# EAGLE board PID-Demo (EAGLE 9.7.0)
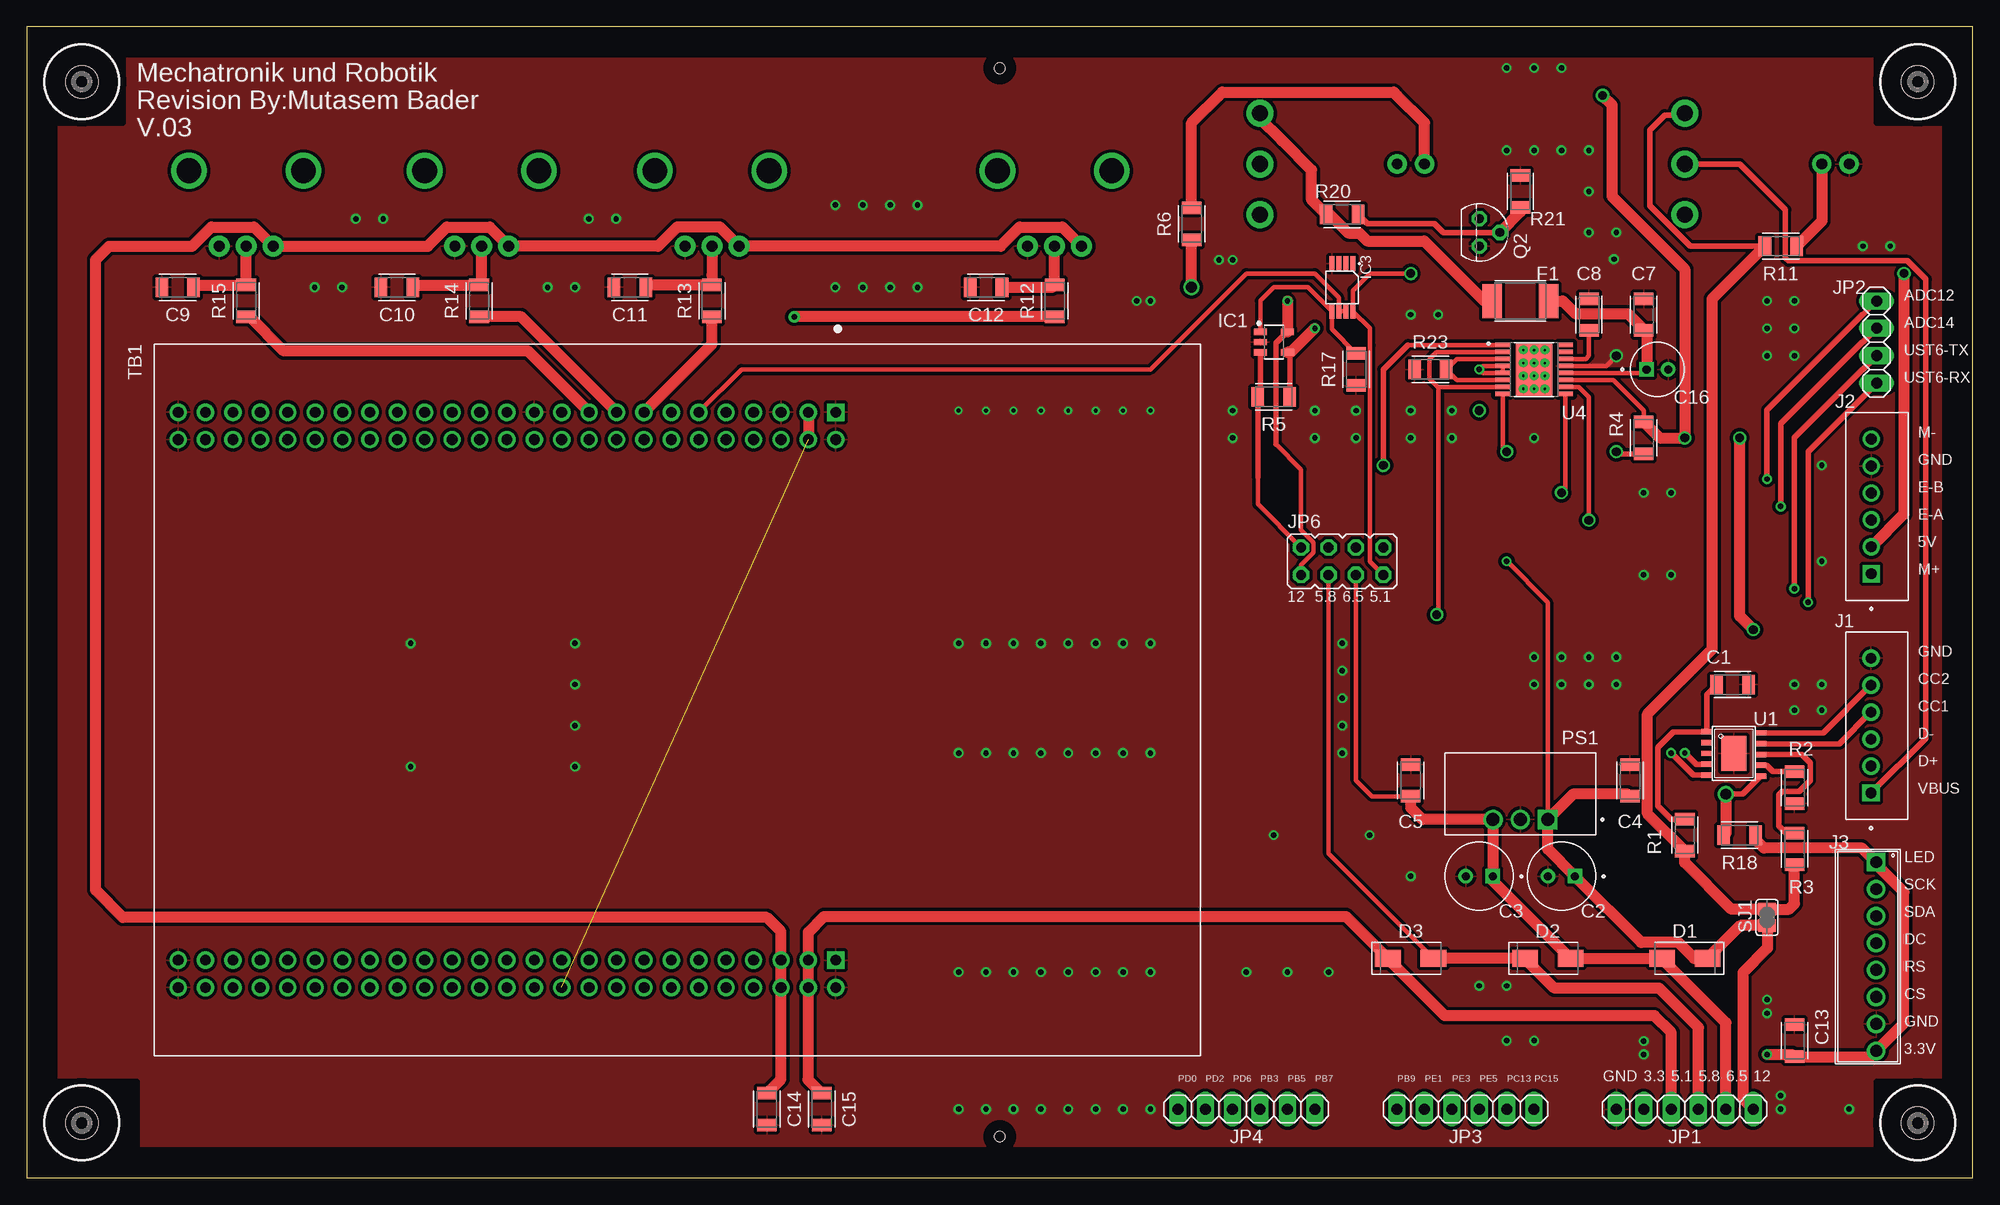
[diagram p0: board, top side]
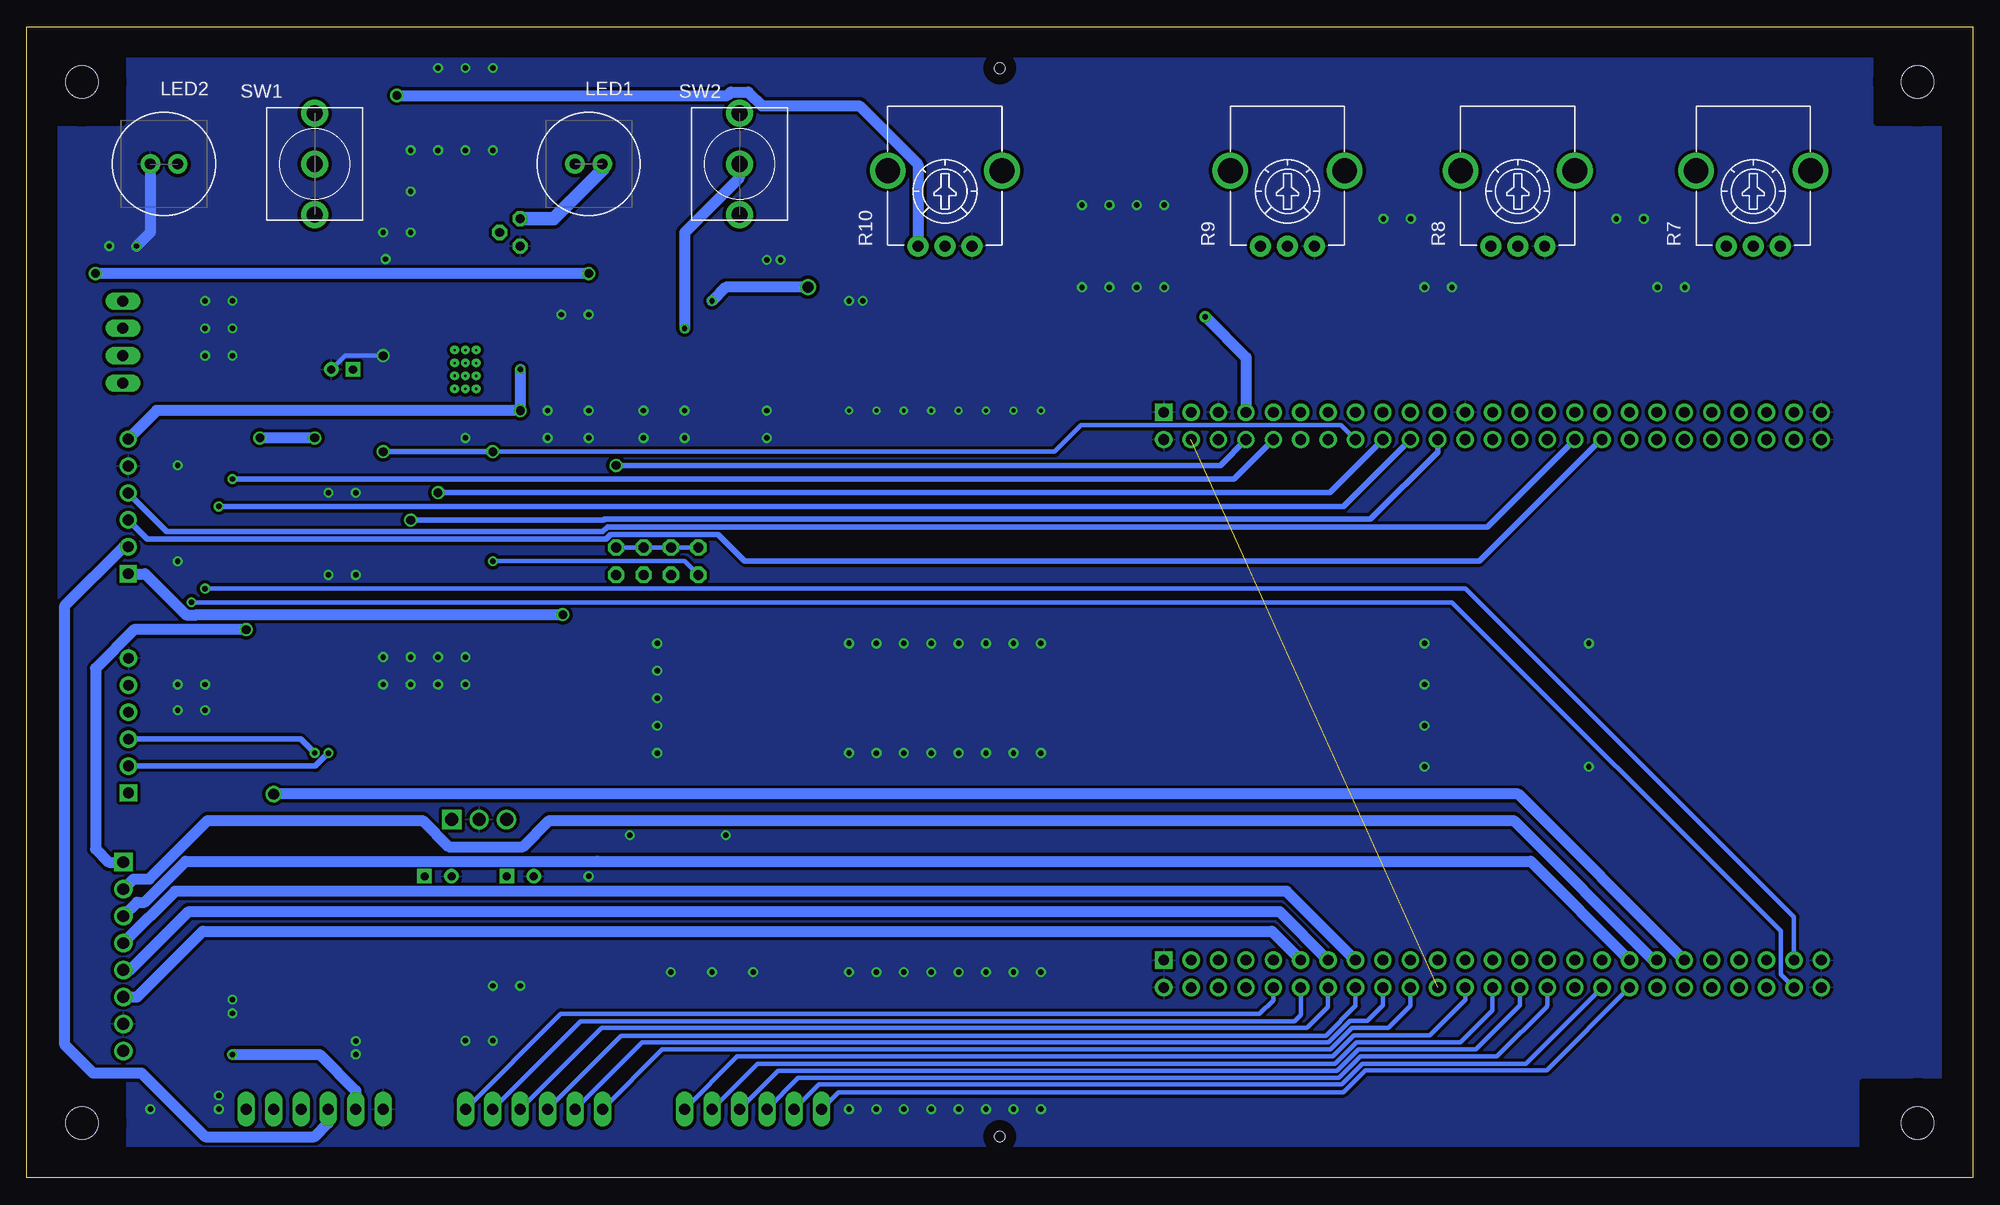
[diagram p1: board, bottom side, seen from below]

Size 180.34 x 106.68 mm. Coordinates in mm from the lower left corner, seen from the top.
Outline: 0,0 180.34,0 180.34,106.68 0,106.68 0,0
Copper layers (1*16): Top / Bottom
Stack-up Default Layer Stack: Top User Defined 0.035mm / Dielectric-1 User Defined 1.5mm / Bottom User Defined 0.035mm
Design rules: minimum copper width 0.4mm, minimum drill size 0.5mm, copper clearance wire_polygon to wire_polygon 0.2mm, copper clearance wire_polygon to pad_smd 0.2mm, copper clearance wire_polygon to via 0.2mm, copper clearance pad_smd to pad_smd 0.2mm, copper clearance pad_smd to via 0.2mm, copper clearance via to via 0.2mm, copper clearance smd to pad (same net) 0.2mm, copper clearance smd to via (same net) 0.2mm, copper clearance smd to smd (same net) 0.2mm, dimension clearance 40mil, via restrict clearance 0.3mm, restrict clearance 0.3mm, drill distance 0.25mm, keepout clearance 0mil
Holes 1 mm at 90.17,102.87 90.17,3.81
RestrictTop: area 0,0 to 10.2,8.9; area 171.4,0 to 180.3,8.9; area 10.2,0 to 171.4,2.5; area 171.4,97.8 to 180.3,106.7; area 8.9,104.1 to 171.4,106.7; area 0,97.8 to 8.9,106.7; area 177.8,8.9 to 180.3,97.8; area 0,8.9 to 2.5,97.8
RestrictBottom: area 0,97.8 to 8.9,106.7; area 8.9,104.1 to 171.4,106.7; area 171.4,97.8 to 180.3,106.7; area 171.4,0 to 180.3,8.9; area 0,0 to 10.2,8.9; area 10.2,0 to 171.4,2.5; area 177.8,8.9 to 180.3,97.8; area 0,8.9 to 2.5,97.8

## Footprints (pad centres in the part's own frame; a part is rotated, then mirrored left to right if it is on the bottom)
CAPC3216X135 = smd 1.165 x 1.815: 1 -1.475,0; 2 1.475,0
CAPPRD250W50D630H1120 = drill 0.75 pad 1.1: N 1.25,0 | drill 0.75 pad 1.1 square: P -1.25,0
CAPPRD200W50D500H1100 = drill 0.75 pad 1.1: N 1,0 | drill 0.75 pad 1.1 square: P -1,0
DIOM5226X290N = smd 2.392 x 1.565: 1 -2.108,0; 2 2.108,0
FUSC4532X125 = smd 1.78 x 3.15: 1 -2.615,0; 2 2.615,0
SOT95P280X145-5N = smd 1.209 x 0.589: 1 -1.253,0.95; 2 -1.253,0; 3 -1.253,-0.95; 4 1.253,-0.95; 5 1.253,0.95
VSSOP-8-DGK = smd 1.4 x 0.45: 1 -2.2,0.975; 2 -2.2,0.325; 3 -2.2,-0.325; 4 -2.2,-0.975; 5 2.2,-0.975; 6 2.2,-0.325; 7 2.2,0.325; 8 2.2,0.975
JST_B6B-XH-A(LF)(SN) = drill 1 square: 1 6.25,-0.525 | drill 1: 2 3.75,-0.525; 3 1.25,-0.525; 4 -1.25,-0.525; 5 -3.75,-0.525; 6 -6.25,-0.525
STECKEVERINDER-8 = drill 1.1 square: P$1 3.77,-1.23 | drill 1.1: P$2 3.77,-3.73; P$3 3.77,-6.23; P$4 3.77,-8.73; P$5 3.77,-11.23; P$6 3.77,-13.73; P$7 3.77,-16.23; P$8 3.77,-18.73
1X06 = drill 1.016 long: 1 -6.35,0; 2 -3.81,0; 3 -1.27,0; 4 1.27,0; 5 3.81,0; 6 6.35,0
1X04 = drill 1.016 long: 1 -3.81,0; 2 -1.27,0; 3 1.27,0; 4 3.81,0
JP4Q = drill 0.914 octagon: 1 -3.81,-1.27; 2 -3.81,1.27; 3 -1.27,-1.27; 4 -1.27,1.27; 5 1.27,-1.27; 6 1.27,1.27; 7 3.81,-1.27; 8 3.81,1.27
CML-19060001-PANEL-M8 = drill 1 pad 1.8: 1 0,1.27; 2 0,-1.27
CONV_TSR_3-2465N = drill 1.2 pad 1.8 square: 1 -2.54,2.36 | drill 1.2 pad 1.8: 2 0,2.36; 3 2.54,2.36
TO92 = drill 0.813 octagon: 1 -1.27,0; 2 0,1.905; 3 1.27,0
RESC3216X70 = smd 1.165 x 1.815: 1 -1.475,0; 2 1.475,0
RK09 = drill 1 pad 1.93: A -2.5,0; E 2.5,0; S 0,0 | drill 2.3 pad 3: P$1 -5.3,7; P$2 5.3,7
RK09K1130A6S = drill 1 pad 1.93: A -2.5,0; E 2.5,0; S 0,0 | drill 2.3 pad 3: P$1 -5.3,7; P$2 5.3,7
SJ = smd 1.168 x 1.6: 1 -0.762,0; 2 0.762,0
GOOBAY-10022-PANEL = drill 1.5 pad 2.5: 1 0,4.7; 2 0,0; 3 0,-4.7
MODULE_STM32F4DISCOVERY = drill 1 square: P1_1 -26.67,14.68; P2_1 24.13,14.68 | drill 1: P1_2 -24.13,14.68; P1_3 -26.67,12.14; P1_4 -24.13,12.14; P1_5 -26.67,9.6; P1_6 -24.13,9.6; P1_7 -26.67,7.06; P1_8 -24.13,7.06; P1_9 -26.67,4.52; P1_10 -24.13,4.52; P1_11 -26.67,1.98; P1_12 -24.13,1.98; P1_13 -26.67,-0.56; P1_14 -24.13,-0.56; P1_15 -26.67,-3.1; P1_16 -24.13,-3.1; P1_17 -26.67,-5.64; P1_18 -24.13,-5.64; P1_19 -26.67,-8.18; P1_20 -24.13,-8.18; P1_21 -26.67,-10.72; P1_22 -24.13,-10.72; P1_23 -26.67,-13.26; P1_24 -24.13,-13.26; P1_25 -26.67,-15.8; P1_26 -24.13,-15.8; P1_27 -26.67,-18.34; P1_28 -24.13,-18.34; P1_29 -26.67,-20.88; P1_30 -24.13,-20.88; P1_31 -26.67,-23.42; P1_32 -24.13,-23.42; P1_33 -26.67,-25.96; P1_34 -24.13,-25.96; P1_35 -26.67,-28.5; P1_36 -24.13,-28.5; P1_37 -26.67,-31.04; P1_38 -24.13,-31.04; P1_39 -26.67,-33.58; P1_40 -24.13,-33.58; P1_41 -26.67,-36.12; P1_42 -24.13,-36.12; P1_43 -26.67,-38.66; P1_44 -24.13,-38.66; P1_45 -26.67,-41.2; P1_46 -24.13,-41.2; P1_47 -26.67,-43.74; P1_48 -24.13,-43.74; P1_49 -26.67,-46.28; P1_50 -24.13,-46.28; P2_2 26.67,14.68; P2_3 24.13,12.14; P2_4 26.67,12.14; P2_5 24.13,9.6; P2_6 26.67,9.6; P2_7 24.13,7.06; P2_8 26.67,7.06; P2_9 24.13,4.52; P2_10 26.67,4.52; P2_11 24.13,1.98; P2_12 26.67,1.98; P2_13 24.13,-0.56; P2_14 26.67,-0.56; P2_15 24.13,-3.1; P2_16 26.67,-3.1; P2_17 24.13,-5.64; P2_18 26.67,-5.64; P2_19 24.13,-8.18; P2_20 26.67,-8.18; P2_21 24.13,-10.72; P2_22 26.67,-10.72; P2_23 24.13,-13.26; P2_24 26.67,-13.26; P2_25 24.13,-15.8; P2_26 26.67,-15.8; P2_27 24.13,-18.34; P2_28 26.67,-18.34; P2_29 24.13,-20.88; P2_30 26.67,-20.88; P2_31 24.13,-23.42; P2_32 26.67,-23.42; P2_33 24.13,-25.96; P2_34 26.67,-25.96; P2_35 24.13,-28.5; P2_36 26.67,-28.5; P2_37 24.13,-31.04; P2_38 26.67,-31.04; P2_39 24.13,-33.58; P2_40 26.67,-33.58; P2_41 24.13,-36.12; P2_42 26.67,-36.12; P2_43 24.13,-38.66; P2_44 26.67,-38.66; P2_45 24.13,-41.2; P2_46 26.67,-41.2; P2_47 24.13,-43.74; P2_48 26.67,-43.74; P2_49 24.13,-46.28; P2_50 26.67,-46.28
CH224K = smd 2.3 x 3.2: P$0 2,2.5 | smd 1.016 x 0.508: P$1 -0.5,4.5; P$2 -0.5,3.5; P$3 -0.5,2.5; P$4 -0.5,1.5; P$5 -0.5,0.5; P$6 4.5,4.4; P$7 4.5,3.4; P$8 4.5,2.4; P$9 4.5,1.4; P$10 4.5,0.4
IC_DRV8848PWPR = smd 1.5 x 0.45: 1 -2.9,2.275; 2 -2.9,1.625; 3 -2.9,0.975; 4 -2.9,0.325; 5 -2.9,-0.325; 6 -2.9,-0.975; 7 -2.9,-1.625; 8 -2.9,-2.275; 9 2.9,-2.275; 10 2.9,-1.625; 11 2.9,-0.975; 12 2.9,-0.325; 13 2.9,0.325; 14 2.9,0.975; 15 2.9,1.625; 16 2.9,2.275 | smd 3.4 x 5: 17 0,0 | drill 0.2 pad 0.3: 18 -1,1.8; 19 0,1.8; 20 1,1.8; 21 -1,0.6; 22 0,0.6; 23 1,0.6; 24 -1,-0.6; 25 0,-0.6; 26 1,-0.6; 27 -1,-1.8; 28 0,-1.8; 29 1,-1.8
DRIL-3 = hole 3: 0,0

## Placement (x,y rotation side)
C1  1µF  [CAPC3216X135]  158.09,45.72 0 top
C2  47µF  [CAPPRD250W50D630H1120]  142.24,27.94 180 top
C3  47µF  [CAPPRD250W50D630H1120]  134.62,27.94 180 top
C4  0,1µF  [CAPC3216X135]  148.59,36.83 90 top
C5  10µF  [CAPC3216X135]  128.27,36.83 90 top
C7  0,1µF  [CAPC3216X135]  149.86,80.01 90 top
C8  2,2µF  [CAPC3216X135]  144.78,80.01 90 top
C9  100nF  [CAPC3216X135]  13.97,82.55 180 top
C10  100nF  [CAPC3216X135]  34.29,82.55 180 top
C11  100nF  [CAPC3216X135]  55.88,82.55 180 top
C12  100nF  [CAPC3216X135]  88.9,82.55 180 top
C13  10µF  [CAPC3216X135]  163.83,12.7 270 top
C14  100nF  [CAPC3216X135]  68.58,6.35 270 top
C15  100nF  [CAPC3216X135]  73.66,6.35 270 top
C16  10µF  [CAPPRD200W50D500H1100]  151.13,74.93 0 top
D1  DIODEDO-214AC(SMA)  [DIOM5226X290N]  153.67,20.32 180 top
D2  DIODEDO-214AC(SMA)  [DIOM5226X290N]  140.97,20.32 0 top
D3  DIODEDO-214AC(SMA)  [DIOM5226X290N]  128.27,20.32 0 top
F1  1812L010  [FUSC4532X125]  138.43,81.28 180 top
IC1  INA138NA_250G4  [SOT95P280X145-5N]  115.57,77.47 0 top
IC3  OPA2340EA  [VSSOP-8-DGK]  121.92,82.55 270 top
J1  B6B-XH-A(LF)(SN)  [JST_B6B-XH-A(LF)(SN)]  171.45,41.91 270 top
J2  B6B-XH-A(LF)(SN)  [JST_B6B-XH-A(LF)(SN)]  171.49,62.23 270 top
J3  STECKVERBINDER-8  [STECKEVERINDER-8]  167.64,30.48 0 top
JP1  PINHD-1X6  [1X06]  153.67,6.35 180 top
JP2  PINHD-1X4  [1X04]  171.45,77.47 270 top
JP3  PINHD-1X6  [1X06]  133.35,6.35 180 top
JP4  PINHD-1X6  [1X06]  113.03,6.35 180 top
JP6  [JP4Q]  121.92,57.15 0 top
LED1  [CML-19060001-PANEL-M8]  128.27,93.98 90 bottom
LED2  [CML-19060001-PANEL-M8]  167.64,93.98 270 bottom
PS1  TSR_3-2465N  [CONV_TSR_3-2465N]  138.43,35.56 180 top
Q2  NMOSFET_TO92-DGS  [TO92]  134.62,87.63 270 top
R1  1KΩ  [RESC3216X70]  153.67,31.75 90 top
R2  24KΩ  [RESC3216X70]  163.83,36.17 90 top
R3  10KΩ  [RESC3216X70]  163.83,30.48 270 top
R4  10KΩ  [RESC3216X70]  149.86,68.58 90 top
R5  250mΩ  [RESC3216X70]  115.57,72.39 180 top
R6  1KΩ  [RESC3216X70]  107.95,88.41 90 top
R7  RK09  [RK09]  20.32,86.36 0 bottom
R8  RK09  [RK09]  42.16,86.36 0 bottom
R9  RK09  [RK09]  63.5,86.36 0 bottom
R10  RK09  [RK09K1130A6S]  95.25,86.36 0 bottom
R11  4,7KΩ  [RESC3216X70]  162.56,86.36 180 top
R12  470Ω  [RESC3216X70]  95.25,81.28 90 top
R13  470Ω  [RESC3216X70]  63.5,81.28 90 top
R14  470Ω  [RESC3216X70]  41.91,81.28 90 top
R15  470Ω  [RESC3216X70]  20.32,81.28 90 top
R17  24KΩ  [RESC3216X70]  123.19,74.93 90 top
R18  10KΩ  [RESC3216X70]  158.75,31.75 0 top
R20  220Ω  [RESC3216X70]  121.92,89.3 0 top
R21  100KΩ  [RESC3216X70]  138.43,91.44 270 top
R23  250mΩ  [RESC3216X70]  130.09,74.93 0 top
SJ1  [SJ]  161.29,24.13 270 top
SW1  [GOOBAY-10022-PANEL]  153.67,93.98 180 bottom
SW2  [GOOBAY-10022-PANEL]  114.3,93.98 180 bottom
TB1  STM32F4DISCOVERY  [MODULE_STM32F4DISCOVERY]  60.29,44.29 270 top
U1  CH224K  [CH224K]  156.21,36.83 0 top
U4  DRV8848PWPR  [IC_DRV8848PWPR]  139.7,74.93 0 top
U$2  [DRIL-3]  5.08,101.6 0 top
U$3  [DRIL-3]  175.26,101.6 0 top
U$4  [DRIL-3]  175.26,5.08 0 top
U$5  [DRIL-3]  5.08,5.08 0 top

## Library data of the parts
C1 C4 C5 C7-C15 = Capacitor; CATEGORY: Capacitor; PACKAGE_SIZE: 1206; PACKAGE_TYPE: Surface Mount; SUBCATEGORY: Ceramic Capacitors; TYPE: MLCC
C2 C3 = EEUEB1H470SH; AVAILABILITY: In Stock; CHECK_PRICES: https://www.snapeda.com/parts/EEUEB1H470SH/Panasonic/view-part/?ref=eda; DESCRIPTION: 47F 50V Aluminum Electrolytic Capacitors Radial, Can 5000 Hrs @ 105C; MF: Panasonic; MP: EEUEB1H470SH; PACKAGE: RADIAL-2 Panasonic; PRICE: None; SNAPEDA_LINK: https://www.snapeda.com/parts/EEUEB1H470SH/Panasonic/view-part/?ref=snap
C16 = EEUEB1H100S; AVAILABILITY: In Stock; CHECK_PRICES: https://www.snapeda.com/parts/EEUEB1H100S/Panasonic/view-part/?ref=eda; DESCRIPTION: Capacitor; Alum Electrolytic; Cap 10 uF; Tol 20%; Vol-Rtg 50 VDC; Radial; 5x11; Bulk; MF: Panasonic; MP: EEUEB1H100S; PACKAGE: RADIAL-2 Panasonic; PRICE: None; SNAPEDA_LINK: https://www.snapeda.com/parts/EEUEB1H100S/Panasonic/view-part/?ref=snap
D1-D3 = Diode; CATEGORY: Diode; DESCRIPTION: Generic diode Surface Mount DO-214AC(SMA); PACKAGE_SIZE: SMA; PACKAGE_TYPE: Surface Mount; SUBCATEGORY: Rectifiers
F1 = Fuse; CATEGORY: Fuses; DATASHEET: https://www.littelfuse.com/assetdocs/resettable-ptcs-1812l-datasheet?assetguid=ca5c80cb-504e-4a8a-8e74-0107520a1717; DESCRIPTION: Polymeric PTC Resettable Fuse 30 V 100 mA Ih Surface Mount 1812 (4532 Metric) Concave; HOLD_CURRENT: 100 mA; MANUFACTURER: Littelfuse Inc.; MAX_VOLTAGE: 30 V; MPN: 1812L010DR; OPERATING_TEMPERATURE: -40°C ~ 85°C; PACKAGE_SIZE: 1812; PACKAGE_TYPE: Surface Mount; PART_STATUS: Active; ROHS: Compliant; SERIES: 1812L; SUBCATEGORY: PTC Resettable Fuses; THERMALLOSS: 0.8 W; TRIP_CURRENT: 300 mA; TYPE: Polymeric
IC1 = INA138NA_250G4; ARROW_PART_NUMBER: INA138NA/250G4; ARROW_PRICE-STOCK: https://www.arrow.com/en/products/ina138na250g4/texas-instruments; DESCRIPTION: High-Side Measurement CURRENT SHUNT MONITOR; HEIGHT: 1.45mm; MANUFACTURER_NAME: Texas Instruments; MANUFACTURER_PART_NUMBER: INA138NA/250G4; MOUSER_PART_NUMBER: 595-INA138NA/250G4; MOUSER_PRICE-STOCK: https://www.mouser.co.uk/ProductDetail/Texas-Instruments/INA138NA-250G4?qs=yhNIDeTE%252BcaV09vm%2F0b34Q%3D%3D
IC3 = TI_OPA2340EA; DATASHEET: https://www.ti.com/lit/ds/symlink/opa2340.pdf; DESCRIPTION: Dual Rail-to-Rail CMOS Op-Amp 5.5MHz 2.5-5.5V VSSOP-8; GBW: 5.5 MHz; IQ_PER_CH: 750 uA; LAND_PATTERN: IPC-7351, TI drawing 4214862/A 04/2023; MANUFACTURER: Texas Instruments; MPN: OPA2340EA/250; MSL: Level-2-260C-1 YEAR; PACKAGE: VSSOP-8 (DGK), JEDEC MO-187; REICHELT: https://www.reichelt.de/de/de/shop/produkt/operationsverstaerker_2-fach_vssop-8-188939; SLEW_RATE: 6 V/us; SUPPLY_V: 2.5V to 5.5V; TEMP_RANGE: -40 to +85 degC (spec), -55 to +125 degC (oper)
J1 J2 = B6B-XH-A_LF__SN_; AVAILABILITY: In Stock; CHECK_PRICES: https://www.snapeda.com/parts/B6B-XH-A(LF)(SN)/JST/view-part/?ref=eda; DESCRIPTION: Connector Header Through Hole 6 position 0.098 (2.50mm); MF: JST Sales America Inc.; MP: B6B-XH-A(LF)(SN); PACKAGE: None; PRICE: None; SNAPEDA_LINK: https://www.snapeda.com/parts/B6B-XH-A(LF)(SN)/JST/view-part/?ref=snap
J3 = Steckverbinder-8
JP1 JP3 JP4 = Connector; CATEGORY: Connectors; DESCRIPTION: Header-Straight-6 Position; PACKAGE_TYPE: Through Hole; PITCH: 0.100" (2.54mm); SUBCATEGORY: Headers; TYPE: Male Pins
JP2 = Connector; CATEGORY: Connectors; DESCRIPTION: Header-Straight-4 Position; PACKAGE_TYPE: Through Hole; PITCH: 0.100" (2.54mm); SUBCATEGORY: Headers; TYPE: Male Pins
JP6 = jumper_JP4Q
LED1 LED2 = CML_19060001; COLOR: Green; DATASHEET: https://cml-it.com/files/drawings/1904xx0x.jpg; DESCRIPTION: LED Signalleuchte gruen blinkend 3.5-13VDC 8mm M8x0.75; FLASH: yes (built-in oscillator); IP_RATING: IP40; MANUFACTURER: CML Innovative Technologies; MOUNTING: Panel Mount M8x0.75; MPN: 19060001; REICHELT: https://www.reichelt.de/de/de/shop/produkt/led-signalleuchte_gruen_blinkend_3_5-13_vdc_8_mm_32_mcd-271929; TERMINAL_PITCH: 2.54mm ESTIMATED - verify with CML (uksales@cml-it.com); TERMINAL_TYPE: Wire leads (Anode 12mm / Kathode 14mm); VOLTAGE: 3.5-13VDC
PS1 = TSR-3N; AVAILABILITY: In Stock; CHECK_PRICES: https://www.snapeda.com/parts/TSR%203-2465N/Traco+Power/view-part/?ref=eda; DESCRIPTION: 3 Amp POL switching regulator, wide input range, pos.-pos. circuit, cost efficient design, TO-220 compatible, SIP-3; MF: Traco Power; MP: TSR 3-2465N; PACKAGE: Package; PRICE: None; PURCHASE-URL: https://www.snapeda.com/api/url_track_click_mouser/?unipart_id=18296038&manufacturer=Traco Power&part_name=TSR 3-2465N&search_term=tsr 3-2465n; SNAPEDA_LINK: https://www.snapeda.com/parts/TSR%203-2465N/Traco+Power/view-part/?ref=snap
Q2 = Transistor; CATEGORY: Transistor; DATASHEET: https://www.analog.com/media/en/package-pcb-resources/package/pkg_pdf/to-92t/T-3-1.pdf; DESCRIPTION: Generic N Channel MOSFET TO92 Package through Hole; PACKAGE_SIZE: TO92; PACKAGE_TYPE: Through Hole; SUBCATEGORY: MOSFET; TYPE: N-Channel
R1-R6 R11-R15 R17 R18 R20 R21 R23 = Resistor; CATEGORY: Resistors; DESCRIPTION: Chip Resistor 3.20 X 1.60 X 0.70 mm body 1206(3216-METRIC) Package; PACKAGE_SIZE: 1206; PACKAGE_TYPE: Surface Mount
R7-R10 = RK09; AVAILABILITY: In Stock; CHECK_PRICES: https://www.snapeda.com/parts/RK09K1130A6S/ALPS/view-part/?ref=eda; DESCRIPTION: 10k Ohm 1 Gang Linear Through Hole, Snap In Potentiometer None 1.0 Kierros 0.05W, 1/20W PC Pins; MF: ALPS; MP: RK09K1130A6S; PACKAGE: None; PRICE: None; SNAPEDA_LINK: https://www.snapeda.com/parts/RK09K1130A6S/ALPS/view-part/?ref=snap
SJ1 = jumper
SW1 SW2 = GOOBAY_10022; CURRENT: 3A; DESCRIPTION: Miniatur-Kippschalter SPDT EIN-AUS-EIN 3A 250V Loetoeser; FUNCTION: SPDT ON-OFF-ON (EIN-AUS-EIN); MANUFACTURER: Goobay / Wentronic GmbH; MOUNTING: Panel Mount, Bushing 6.5mm Bohrung; MPN: 10022; PIN_PITCH: 4.70mm (GESCHAETZT aus M1QE Referenz - bei cs@wentronic.com bestaetigen); REFERENCE_DS: SPC Multicomp M1QE SPDT Solder Lug (Farnell 32918); REICHELT: https://www.reichelt.de/de/de/shop/produkt/miniatur-kippschalter_ein-aus-ein_3_a_250_v-285989; TERMINAL_TYPE: Loetoeser (Solder Lug); VOLTAGE: 250V AC
TB1 = STM32F4DISCOVERY; AVAILABILITY: In Stock; CHECK_PRICES: https://www.snapeda.com/parts/STM32F4DISCOVERY/STMicroelectronics/view-part/?ref=eda; DESCRIPTION: STM32F407VGT6 Discovery STM32F4 ARM® Cortex®-M4 MCU 32-Bit Embedded Evaluation Board; MF: STMicroelectronics; MP: STM32F4DISCOVERY; PACKAGE: None; PRICE: None; SNAPEDA_LINK: https://www.snapeda.com/parts/STM32F4DISCOVERY/STMicroelectronics/view-part/?ref=snap
U1 = CH224K
U4 = DRV8848PWPR; AVAILABILITY: In Stock; CHECK_PRICES: https://www.snapeda.com/parts/DRV8848PWPR/Texas+Instruments/view-part/?ref=eda; DESCRIPTION: 18-V, 2-A dual H-bridge motor driver with current regulation; MF: Texas Instruments; MP: DRV8848PWPR; PACKAGE: HTSSOP-16 Texas Instruments; PRICE: None; SNAPEDA_LINK: https://www.snapeda.com/parts/DRV8848PWPR/Texas+Instruments/view-part/?ref=snap
U$2-U$5 = special

## Nets
+3.3V: C13.2 C14.1 J3.P$1 J3.P$8 JP1.5 R4.2 R7.A R8.A R9.A R10.A R18.2 TB1.P2_5 TB1.P2_6 U4.11
+5.1V: C15.1 D3.1 IC3.8 J2.2 JP1.4 JP6.7 TB1.P2_3 TB1.P2_4
+5.8V: D2.1 D3.2 JP1.3 JP6.3
+6.5: C3.P C5.1 D1.2 D2.2 JP1.2 JP6.5 PS1.3
+12V: C2.P C4.1 D1.1 IC1.5 JP1.1 JP6.1 PS1.1 R6.1 SJ1.2
ADC12: JP2.1 TB1.P1_10
ADC14: JP2.2 TB1.P1_20
BIN1: TB1.P1_18 U4.9
BIN2: TB1.P1_22 U4.10
CC1: J1.4 U1.P$7
CC2: J1.5 U1.P$6
CS: J3.P$6 TB1.P2_11
D+: J1.2 U1.P$5
D-: J1.3 U1.P$4
DC: J3.P$4 TB1.P2_15
ENCODER-A: J2.3 TB1.P1_34
ENCODER-B: J2.4 TB1.P1_32
GND: C1.2 C2.N C3.N C4.2 C5.2 C7.2 C8.2 C9.2 C10.2 C11.2 C12.2 C13.1 C14.2 C15.2 C16.N IC1.2 IC3.4 J1.6 J2.5 J3.P$7 JP1.6 LED2.2 PS1.2 Q2.3 R2.1 R7.E R8.E R9.E R10.E R17.1 R21.1 R23.1 TB1.P1_1 TB1.P1_2 TB1.P1_5 TB1.P1_23 TB1.P1_49 TB1.P1_50 TB1.P2_1 TB1.P2_2 TB1.P2_49 TB1.P2_50 U1.P$0 U4.13
I-OPA: IC3.6 IC3.7 TB1.P1_11
MOTOR+: J2.1 U4.2 U4.7
MOTOR-: J2.6 U4.4 U4.5
N$1: R3.1 U1.P$8
N$2: R2.2 U1.P$9
N$5: C8.1 U4.14
N$8: C11.1 R9.S R13.2
N$10: Q2.2 R20.2 R21.2
N$11: IC1.4 R5.1 SW2.2
N$13: LED1.1 R6.2
N$14: F1.2 R20.1 SW2.3
N$15: R23.2 U4.3 U4.6
N$17: IC1.1 IC3.5 R17.2
N$18: IC1.3 JP6.2 JP6.4 JP6.6 JP6.8 R5.2
N$19: C10.1 R8.S R14.2
N$20: C9.1 R7.S R15.2
N$21: R12.1 TB1.P1_7
N$22: C12.1 R10.S R12.2
N$23: R15.1 TB1.P1_19
N$31: R13.1 TB1.P1_15
N$32: LED2.1 R11.1
N$33: R1.1 R3.2 R11.2 SJ1.1 SW1.3
N$34: C7.1 C16.P F1.1 U4.12
N$36: R14.1 TB1.P1_17
N$37: LED1.2 Q2.1
NFAULT: R4.1 TB1.P1_16 U4.8
NSLEEP: TB1.P1_8 U4.1
PB3: JP4.3 TB1.P2_28
PB5: JP4.2 TB1.P2_26
PB7: JP4.1 TB1.P2_24
PB9: JP3.6 TB1.P2_20
PC13: JP3.2 TB1.P2_12
PC15: JP3.1 TB1.P2_10
PD0: JP4.6 TB1.P2_36
PD2: JP4.5 TB1.P2_34
PD6: JP4.4 TB1.P2_30
PE1: JP3.5 TB1.P2_18
PE3: JP3.4 TB1.P2_16
PE5: JP3.3 TB1.P2_14
PG: R18.1 TB1.P2_39 U1.P$10
RS: J3.P$5 TB1.P2_13
SCK: J3.P$2 TB1.P2_37
SDA: J3.P$3 TB1.P2_35
USART6-RX: JP2.4 TB1.P2_48
USART6-TX: JP2.3 TB1.P2_47
VBUS: J1.1 SW1.2
VDD: TB1.P1_3 TB1.P1_4 TB1.P2_22
VIN: C1.1 R1.2 U1.P$1

## Tracks (layer width: path | path; a pad name or v marks a point on that pad's centre or on a via)
+3.3V  (via drill 0.5, 0.8)
  Top 0.406: R4.2 149.86,71.12 147.03,73.95 U4.11
  Top 1.016: R10.A 97.02,87.09 95.98,88.13 92.02,88.13 90.24,86.36 R9.A 65.27,87.09 64.23,88.13 60.27,88.13 58.49,86.36 R8.A 42.89,88.13 38.92,88.13 37.15,86.36 R7.A 22.09,87.09 21.05,88.13 17.09,88.13 15.31,86.36 7.62,86.36 6.35,85.09 6.35,26.67 8.89,24.13 68.58,24.13 69.89,22.82 TB1.P2_5 TB1.P2_6 69.89,9.13 C14.1 | v158.75,68.58 158.75,52.07 v160.02,50.8 | R4.2 151.34,68.58 v153.67,68.58 153.67,84.24 146.92,90.99 146.92,99.46 v146.05,100.33 | R18.2 160.22,31.34 161,30.57 170.09,30.57 J3.P$1 171.75,28.91 171.75,28.73 173.99,26.49 173.99,14.33 J3.P$8 170.88,11.22 C13.2 163.62,11.43 v161.29,11.43
  Bottom 1.016: v153.67,68.58 v158.75,68.58 | JP1.5 149.86,8.06 153.23,11.43 v161.29,11.43 | R10.A 97.75,93.94 103.18,99.37 112.22,99.37 113.49,100.64 115.11,100.64 115.42,100.33 v146.05,100.33 | v160.02,50.8 170.42,50.8 173.99,47.23 173.99,30.48 172.76,29.25 J3.P$1
+5.1V  (via drill 0.8)
  Top 0.4: JP6.7 124.5,57.11 124.5,77.15 124.46,77.19 124.46,78.74 122.89,80.31 IC3.8
  Top 0.406: v128.27,83.82 124.46,83.82 122.89,82.25 IC3.8
  Top 1.016: JP1.4 152.4,13.47 150.85,15.02 131.43,15.02 126.16,20.29 D3.1 122.27,24.21 73.88,24.21 72.43,22.76 TB1.P2_3 TB1.P2_4 72.39,17.58 72.39,9.1 C15.1 | J2.2 173.99,61.51 v173.99,83.82
  Bottom 1.016: J2.2 171.39,58.48 176.82,53.05 176.82,12.31 174.21,9.7 169.72,9.7 163.83,3.81 153.67,3.81 152.4,5.08 JP1.4 | v128.27,83.82 v173.99,83.82
+5.8V
  Top 0.4: JP6.3 120.65,30.05 D3.2
  Top 1.016: D3.2 D2.1 138.86,20.29 141.59,17.56 151.3,17.56 154.94,13.92 JP1.3
+6.5
  Top 0.4: C5.1 124.67,35.35 123.19,36.83 JP6.5
  Top 1.016: C5.1 128.27,34.29 129.36,33.2 PS1.3 135.89,27.96 C3.P 135.87,27.53 D2.2 D1.2 151.56,20.29 157.48,14.37 JP1.2
+12V  (via drill 0.5, 1 pad 1.05)
  Top 0.4: 115.77,68 118.11,65.66 118.11,60.06 119.27,58.9 119.27,57.94 118.11,56.78 JP6.1 | v137.16,57.15 140.97,53.34 PS1.1
  Top 0.508: IC1.5 115.77,77.36 115.77,68
  Top 1.016: JP1.1 159.05,7.32 159.05,19.01 161.34,21.3 161.34,23.32 SJ1.2 158.83,23.37 D1.1 154.54,20.32 153.05,21.81 149.62,21.81 C2.P 140.97,30.46 PS1.1 143.33,35.56 148.38,35.56 C4.1 | v107.95,82.55 R6.1 | v116.84,81.28 116.84,78.44 IC1.5
  Bottom 0.4: JP6.1 119.38,57.15 v137.16,57.15
  Bottom 1.016: v107.95,82.55 115.57,82.55 v116.84,81.28
ADC12  (via drill 0.5)
  Top 0.508: JP2.1 170.17,80 170.12,80 161.29,71.17 v161.29,64.77
  Bottom 0.508: TB1.P1_10 68.46,64.77 v161.29,64.77
ADC14  (via drill 0.5)
  Top 0.508: JP2.2 170.17,77.46 170.12,77.46 162.56,69.9 v162.56,62.23
  Bottom 0.508: v162.56,62.23 58.3,62.23 TB1.P1_20
BIN1  (via drill 0.8)
  Top 0.406: U4.9 142.6,63.86 v142.24,63.5
  Bottom 0.508: v142.24,63.5 59.57,63.5 TB1.P1_18
BIN2  (via drill 0.8)
  Top 0.406: U4.10 143.87,73.31 144.78,72.39 v144.78,60.96
  Bottom 0.508: TB1.P1_22 49.57,67.27 55.79,61.05 126.82,61.05 126.91,60.96 v144.78,60.96
CC1
  Top 0.508: J1.4 168,40.23 U1.P$7
CC2
  Top 0.508: U1.P$6 166.5,41.23 J1.5
CS
  Bottom 1.016: J3.P$6 170.14,16.75 164.04,22.85 64.95,22.85 TB1.P2_11
D+  (via drill 0.5)
  Top 0.508: U1.P$5 154.44,37.33 v152.4,39.37
  Bottom 0.508: J1.2 153.61,38.16 v152.4,39.37
D-  (via drill 0.5)
  Top 0.508: U1.P$4 154.72,38.33 v153.68,39.38 | v153.68,39.38
  Bottom 0.508: J1.3 154.96,40.66 v153.68,39.38
DC
  Bottom 1.016: J3.P$4 166.6,26.56 63.58,26.56 TB1.P2_15
ENCODER-A
  Bottom 0.508: TB1.P1_34 34.45,68.42 45.7,57.17 113.82,57.17 116.28,59.63 126.23,59.63 126.67,59.2 169.18,59.2 J2.3
ENCODER-B
  Bottom 0.508: J2.4 167.38,59.9 126.96,59.9 126.53,60.34 44.95,60.34 TB1.P1_32
GND  (via drill 0.35, 0.5, 0.8)
  Top 0.406: U4.13 146.38,75.25 v147.32,76.2
  Bottom 0.406: v147.32,76.2 150.86,76.2 C16.N
  Bottom 1.016: LED2.2 168.91,87.63 v170.18,86.36
  other vias: 86.36,39.37 88.9,39.37 91.44,39.37 93.98,39.37 96.52,39.37 99.06,39.37 101.6,39.37 86.36,19.05 88.9,19.05 91.44,19.05 93.98,19.05 96.52,19.05 99.06,19.05 101.6,19.05 104.14,19.05 104.14,39.37 82.55,82.55 80.01,82.55 77.47,82.55 74.93,82.55 86.36,71.12 88.9,71.12 91.44,71.12 93.98,71.12 96.52,71.12 99.06,71.12 101.6,71.12 104.14,71.12 86.36,49.53 88.9,49.53 91.44,49.53 93.98,49.53 96.52,49.53 99.06,49.53 101.6,49.53 104.14,49.53 149.86,11.43 162.56,7.62 162.56,6.35 168.91,6.35 161.29,15.24 161.29,16.51 119.38,71.12 123.19,71.12 119.38,68.58 123.19,68.58 137.16,95.25 139.7,95.25 142.24,95.25 144.78,95.25 144.78,91.44 144.78,87.63 147.32,87.63 161.29,78.74 163.83,78.74 163.83,76.2 161.29,76.2 137.16,102.87 139.7,102.87 142.24,102.87 111.76,85.09 104.14,81.28 102.87,81.28 128.27,80.01 130.81,80.01 147.32,48.26 147.32,45.72 111.76,71.12 111.76,68.58 86.36,6.35 88.9,6.35 91.44,6.35 93.98,6.35 96.52,6.35 99.06,6.35 101.6,6.35 104.14,6.35 52.07,88.9 54.61,88.9 48.26,82.55 50.8,82.55 29.21,82.55 26.67,82.55 30.48,88.9 33.02,88.9 74.93,90.17 77.47,90.17 80.01,90.17 82.55,90.17 163.83,45.72 166.37,45.72 149.86,55.88 152.4,55.88 149.86,63.5 152.4,63.5 128.27,71.12 128.27,68.58 132.08,71.12 132.08,68.58 139.7,68.58 149.86,12.66 110.49,85.09 172.72,86.36 50.8,49.53 50.8,45.72 50.8,41.91 50.8,38.1 35.56,49.53 35.56,38.1 139.7,12.7 134.62,17.78 128.27,27.94 120.65,19.05 116.84,19.05 115.57,31.75 124.46,31.75 139.7,45.72 147.1,85.15 166.37,43.33 163.83,43.33 139.7,48.26 166.37,66.04 166.37,57.15 137.16,12.7 137.16,17.78 113.03,19.05 163.83,81.28 161.29,81.28 121.92,49.53 121.92,46.99 121.92,44.45 121.92,41.91 121.92,39.37 142.24,45.72 142.24,48.26 144.78,48.26 144.78,45.72
  pour Top (isolate 0.305): -2.54,110.49 182.88,110.49 182.88,-2.51 -1.33,-1.27 -2.54,93.98
  pour Bottom (isolate 0.305): -3.81,114.3 185.42,114.3 185.42,-5.08 184.15,-6.35 0,-6.35 -3.81,-2.54
I-OPA
  Top 0.406: TB1.P1_11 66.24,74.93 104.14,74.93 113.03,83.82 119.38,83.82 121.59,81.61 IC3.6 IC3.7
MOTOR+  (via drill 0.8)
  Top 0.4: U4.2 131.6,76.56
  Top 0.406: 130.79,73.31 130,74.1 130,75.9 130.66,76.56 131.6,76.56 | 130.79,73.31 U4.7 | 130.79,73.31 130.81,73.29 130.81,52.33 v130.68,52.2
  Bottom 1.016: v130.68,52.2 164.6,52.2 164.62,52.18 165.58,52.18 169.38,55.98 J2.1
MOTOR-  (via drill 0.5, 0.8)
  Top 0.406: U4.4 U4.5 134.94,74.61 v134.62,74.93 134.94,75.25 U4.4
  Bottom 1.016: v134.62,74.93 v134.62,71.12 168.32,71.12 J2.6
N$1
  Top 0.508: R3.1 163.02,31.95 162.37,32.61 162.37,35.5 162.69,35.83 164.29,35.83 165.29,36.83 165.29,38.45 164.51,39.23 U1.P$8
N$2
  Top 0.508: U1.P$9 161.25,38.23 161.84,37.64 R2.2
N$5
  Top 0.406: U4.14 144.49,75.91 144.78,76.2 C8.1
N$8
  Top 1.016: C11.1 57.56,82.75 R13.2 63.5,83.7 R9.S
N$10
  Top 0.508: Q2.2 131.27,87.63 130.44,88.46 124.23,88.46 R20.2
  Top 1.016: Q2.2 138.43,89.53 R21.2
N$11  (via drill 0.5)
  Top 0.508: R5.1 117.05,76.3 IC1.4
  Top 1.016: v119.38,78.74 117.16,76.52 IC1.4
  Bottom 1.016: SW2.2 114.3,92.71 119.38,87.63 v119.38,78.74
N$13
  Top 1.016: R6.2 107.95,97.79 110.8,100.64 126.69,100.64 127,100.33 129.54,97.79 LED1.1
N$14
  Top 1.016: F1.2 135.07,81.28 129.52,86.83 124.24,86.83 123.49,87.58 122.48,87.58 120.76,89.3 R20.1 119.07,90.67 119.07,93.42 116.41,96.09 116.28,96.21 114.3,98.19 SW2.3
N$15
  Top 0.4: U4.6 133.35,73.95 132.54,73.95 R23.2 132.54,75.91 133.35,75.91 U4.3
N$17
  Top 0.4: R17.2 120.94,78.65 IC3.5 118.75,82.55 115.57,82.55 114.32,81.3 IC1.1
N$18
  Top 0.4: JP6.2 114.09,62.44 114.09,64.97
  Top 0.508: 114.09,64.97 R5.2 114.32,72.61 IC1.3
  Bottom 0.4: JP6.8 JP6.6 JP6.4 JP6.2
N$19
  Top 1.016: C10.1 35.97,82.75 R14.2 42.16,83 R8.S
N$20
  Top 1.016: R7.S R15.2 15.65,82.75 C9.1
N$21  (via drill 0.5 pad 1.05)
  Top 1.016: R12.1 v71.11,79.81
  Bottom 1.016: v71.11,79.81 67.35,76.04 TB1.P1_7
N$22
  Top 1.016: R10.S R12.2 95.05,82.55 C12.1
N$23
  Top 1.016: TB1.P1_19 46.44,76.64 23.81,76.64 20.64,79.81 R15.1
N$31
  Top 1.016: R13.1 63.5,77.27 TB1.P1_15
N$32
  Top 1.016: LED2.1 166.37,88.69 R11.1
N$33
  Top 0.508: SW1.3 153.49,98.5 151.8,98.5 150.42,97.12 150.42,90.12 154.18,86.36 R11.2
  Top 1.016: R3.2 163.83,25.4 163.32,24.89 SJ1.1 157.99,24.89 153.67,29.21 R1.1 150.21,33.74 150.21,43.01 156.21,49.01 156.21,81.48 R11.2
N$34
  Top 0.406: U4.12 149.81,74.61 C16.P
  Top 1.016: F1.1 142.35,81.28 143.54,80.09 148.39,80.09 149.86,78.63 C7.1 150.13,78.27 C16.P
N$36
  Top 1.016: TB1.P1_17 45.81,79.81 R14.1
N$37
  Bottom 1.27: Q2.1 131.53,88.9 127,93.44 LED1.2
NFAULT  (via drill 0.8)
  Top 0.406: U4.8 136.8,67.67 v137.16,67.31
  Top 0.508: R4.1 147.53,67.11 v147.32,67.31
  Bottom 0.406: v137.16,67.31 85.09,67.31 82.64,69.76 58.53,69.76 TB1.P1_16
  Bottom 0.508: v147.32,67.31 v137.16,67.31
NSLEEP  (via drill 0.8)
  Top 0.406: U4.1 128,77.2
  Top 0.508: 128,77.2 125.73,74.93 v125.73,66.04
  Bottom 0.508: v125.73,66.04 69.73,66.04 TB1.P1_8
PB3
  Bottom 0.406: JP4.3 110.74,9.91 58.91,9.91 56.93,11.89 46.04,11.89 41.95,15.98 TB1.P2_28
PB5
  Bottom 0.406: JP4.2 112.62,10.57 59.11,10.57 57.13,12.55 47.48,12.55 44.49,15.54 TB1.P2_26
PB7
  Bottom 0.406: JP4.1 114.5,11.23 59.31,11.23 57.33,13.21 50.29,13.21 47.03,16.47 TB1.P2_24
PB9
  Bottom 0.406: JP3.6 121.46,11.89 59.51,11.89 57.52,13.87 54.16,13.87 52.11,15.92 TB1.P2_20
PC13
  Bottom 0.406: TB1.P2_12 62.27,15.08 62.88,14.48 129.03,14.48 JP3.2
PC15
  Bottom 0.406: JP3.1 130.86,15.19 66.08,15.19 64.81,16.46 TB1.P2_10
PD0
  Bottom 0.406: JP4.6 105.1,7.93 58.32,7.93 56.29,9.96 39.45,9.96 TB1.P2_36
PD2
  Bottom 0.406: TB1.P2_34 41.38,10.57 56.54,10.57 58.47,8.64 106.93,8.64 JP4.5
PD6
  Bottom 0.406: JP4.4 108.86,9.25 58.72,9.25 56.74,11.23 44.1,11.23 39.48,15.85 39.48,15.91 39.41,15.98 TB1.P2_30
PE1
  Bottom 0.406: TB1.P2_18 54.65,15.98 56.1,14.53 57.72,14.53 59.69,12.56 123.33,12.56 JP3.5
PE3
  Bottom 0.406: TB1.P2_16 57.19,15.92 59.94,13.17 125.26,13.17 JP3.4
PE5
  Bottom 0.406: TB1.P2_14 59.73,15.85 61.71,13.87 127.1,13.87 JP3.3
PG  (via drill 1)
  Top 0.508: U1.P$10 159.04,35.56 v157.48,35.56
  Top 1.016: R18.1 157.48,31.95 v157.48,35.56
  Bottom 1.016: TB1.P2_39 42.11,35.56 v157.48,35.56
RS
  Bottom 1.016: J3.P$5 170.77,19.25 165.35,24.68 64.24,24.68 TB1.P2_13
SCK
  Bottom 1.016: TB1.P2_37 29.58,20.16 42.52,33.1 131.94,33.1 134.36,30.68 141.25,30.68 143.67,33.1 163.59,33.1 169,27.69 170.47,27.69 J3.P$2
SDA
  Bottom 1.016: TB1.P2_35 40.96,29.33 127.48,29.33 127.49,29.32 165.65,29.32 169.44,25.53 170.13,25.53 J3.P$3
USART6-RX  (via drill 0.5)
  Top 0.508: v165.1,53.34 165.1,67.31 JP2.4
  Bottom 0.406: TB1.P2_48 17.78,18.85 17.78,22.86 48.26,53.34 v165.1,53.34
USART6-TX  (via drill 0.5)
  Top 0.508: JP2.3 170.17,74.92 170.12,74.92 163.83,68.63 v163.83,54.61
  Bottom 0.406: TB1.P2_47 16.55,24.17 46.99,54.61 v163.83,54.61
VBUS
  Top 0.508: SW1.2 158.75,93.98 163,89.73 163,85.26 163.26,85 174.31,85 176.01,83.3 176.01,40.74 J1.1
VDD  (1 unrouted)
  Top 1.016: TB1.P1_3 TB1.P1_4
VIN
  Top 0.508: C1.1 155.71,44.82 U1.P$1 152.62,41.33 151.17,39.87 151.17,34.46 152.4,33.23 R1.2

## Text on the board
SilkscreenTop: Mechatronik und Robotik | Revision By: | Mutasem Bader | V.03 | ADC12 | ADC14 | UST6-TX | UST6-RX | M- | GND | E-B | E-A | 5V | M+ | 12 | 5.8 | 6.5 | 5.1 | GND | CC2 | CC1 | D- | D+ | VBUS | LED | SCK | SDA | DC | RS | CS | GND | 3.3V | PD0 | PD2 | PD6 | PB3 | PB5 | PB7 | PB9 | PE1 | PE3 | PE5 | PC13 | PC15 | GND | 3.3 | 5.1 | 5.8 | 6.5 | 12 | 12 | 12